# Altium PCB 海关全向控制器数传转接板V4.PcbDoc
Units mil, origin at the board's own origin, x right, y up, seen from the top; angles counter-clockwise.
Board outline 984.25 x 3346.46 mil, 2 copper layers (Top Layer, Bottom Layer), stack 65.792 mil thick; 35 components, 29 nets, 110 pads, 16 vias.
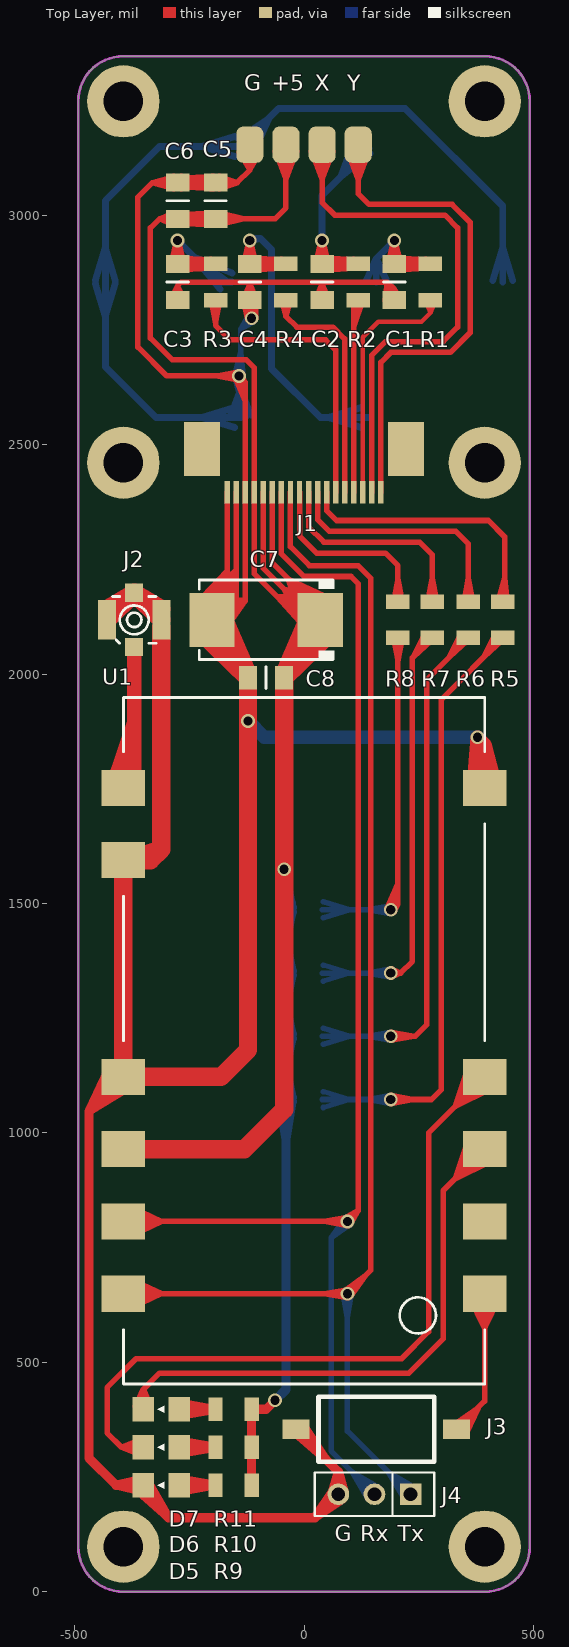
[diagram p0: Top Layer view]
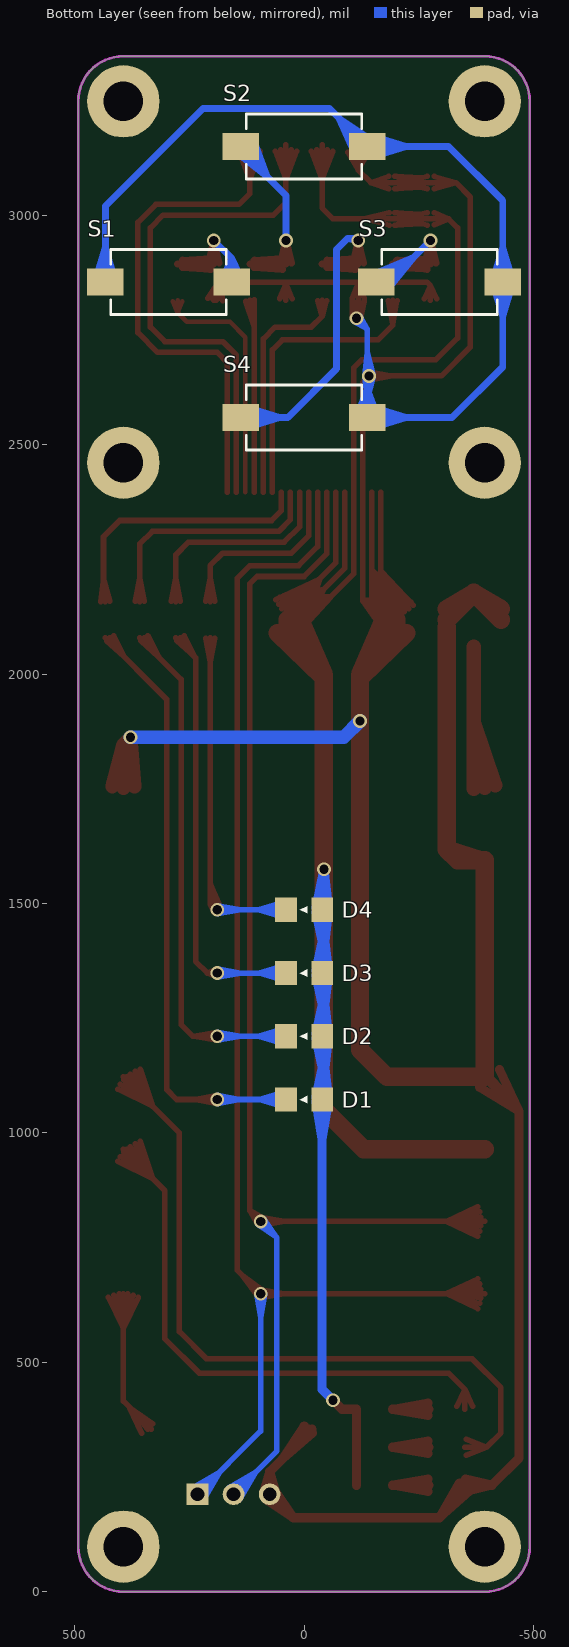
[diagram p1: Bottom Layer view, seen from below]
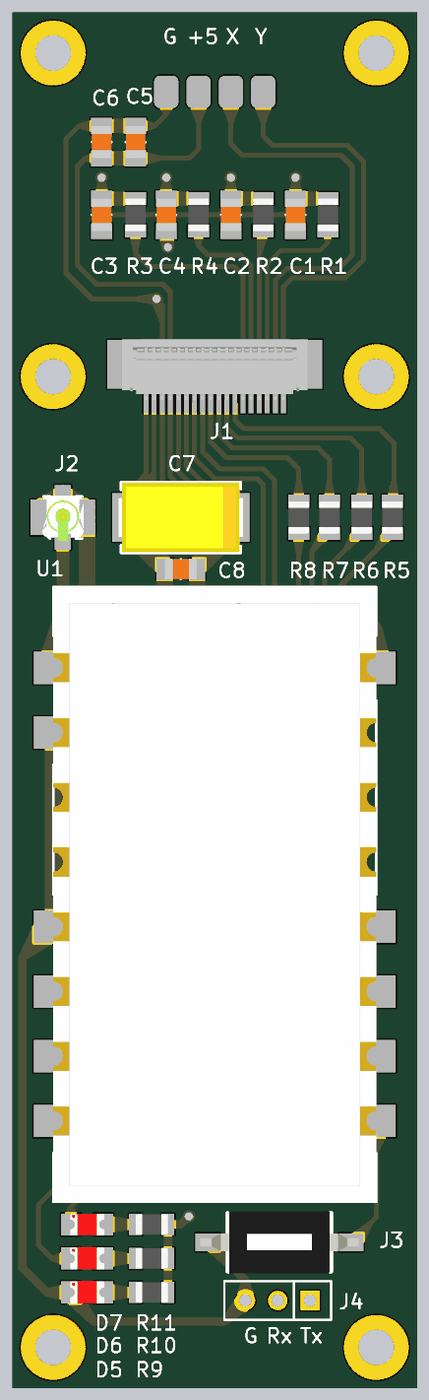
[diagram p2: 3D render of the assembled board from above, using the file's embedded part models]
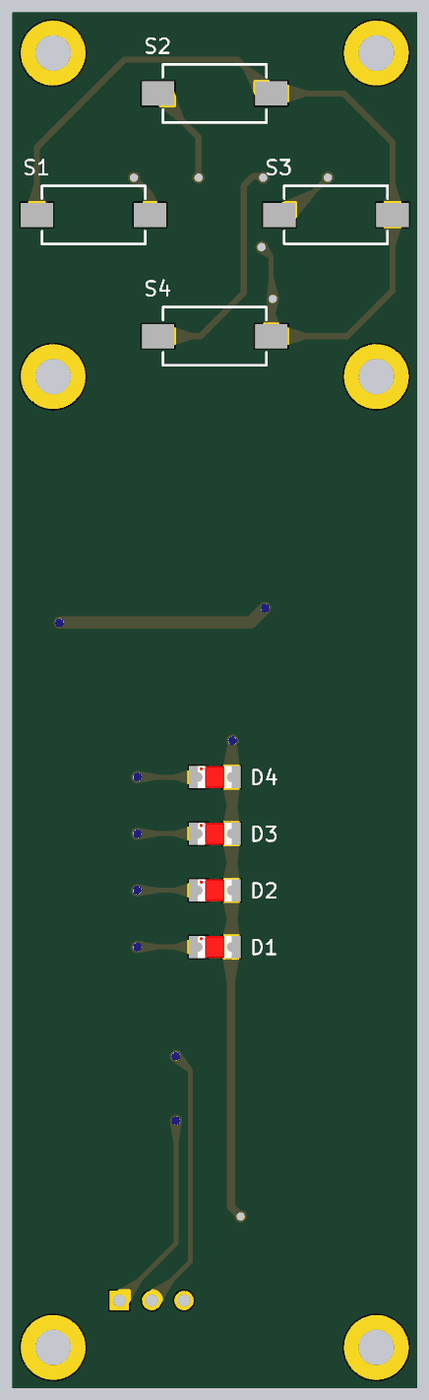
[diagram p3: 3D render of the assembled board from below, using the file's embedded part models]

## Layer stack, top to bottom
Top Solder: solder mask 0.4, Solder Resist, Dk 3.5
Top Layer: signal copper 1.4
Dielectric 1: dielectric 62.9921, FR-4, Dk 4.8
Bottom Layer: signal copper 1.4
Bottom Solder: solder mask 0.4, Solder Resist, Dk 3.5

## Board outline
-492.13,98.43 ccw(c-393.7,98.43) -393.7,0 393.7,0 ccw(c393.7,98.43) 492.13,98.43 492.13,3248.03 ccw(c393.7,3248.03) 393.7,3346.46 -393.7,3346.46 ccw(c-393.7,3248.03) -492.13,3248.03

## Design rules (kind name [scope] priority, off if disabled: settings)
Clearance [All] p1: gap=6
ComponentClearance [All] p1: gap=0 collisioncheckmode=3 verticalgap=0 showdistances=FALSE
Height [All] p1: minheight=0 maxheight=2000 prefheight=500
HoleSize [All] p1: absolutevalues=TRUE maxlimit=200 minlimit=1 maxpercent=80.000 minpercent=20.000
HoleToHoleClearance [All] p1: gap=6 allowstackedmicrovias=TRUE
MinimumSolderMaskSliver [All] p1: minsoldermaskwidth=0
PlaneConnect [All] p1: planeconnectstyle=Direct reliefexpansion=20 reliefentries=4 reliefconductorwidth=10 reliefairgap=10
PolygonConnect [All] p1: connectstyle=Direct reliefconductorwidth=10 reliefentries=4 polygonreliefangle="90 Angle" airgapwidth=10
RoutingVias [All] p1: holewidth=28 width=50 viastyle="Through Hole" minholewidth=8 minwidth=12 maxholewidth=200 maxwidth=300
SilkToSilkClearance [All] p1: silktosilkclearance=0
SilkToSolderMaskClearance [IsPad] p1: minsilkscreentomaskgap=0 clearancetoexposedcopper=TRUE
SolderMaskExpansion [All] p1: expansion=4
Width [All] p1: maxlimit=157.48 minlimit=10 preferedwidth=10
21 further rules are at their usual default settings.

## Components (designator, comment, footprint, x,y, rotation, side; value= is the part's Value field where it differs from the comment)
C1 "0.1uF" C0805 196.85,2854.33 r90 top
C2 "0.1uF" C0805 39.37,2854.33 r90 top
C3 "0.1uF" C0805 -275.59,2854.33 r90 top
C4 "0.1uF" C0805 -118.11,2854.33 r90 top
C5 "10uF" C0805 -192.91,3031.5 r270 top
C6 "0.1uF" C0805 -275.59,3031.5 r270 top
C7 "100uF/25V" C7343 -82.68,2118.11 r180 top
C8 "10uF" C0805 -82.68,1992.13 r0 top
D1 "LED" LED0805 0,1072.84 r0 bottom locked
D2 "LED" LED0805 0,1210.63 r0 bottom locked
D3 "LED" LED0805 0,1348.43 r0 bottom
D4 "LED" LED0805 0,1486.22 r0 bottom
D5 "LED" LED0805 -311.02,232.28 r180 top
D6 "LED" LED0805 -311.02,314.96 r180 top
D7 "LED" LED0805 -311.02,397.64 r180 top
J1 "Jack 1x18" 0.5S-6X-18PB 0,2443.41 r180 top
J2 "ANT-ipex" IPEX -370.08,2118.11 r0 top
J3 "Jack 1x2" A6S-1101-PH 157.48,354.33 r180 top
J4 "Jack 1x3" Jk1*3-2.0 153.54,212.6 r180 top
R1 "1K" R0805 275.59,2854.33 r90 top
R2 "1K" R0805 118.11,2854.33 r90 top
R3 "1K" R0805 -192.91,2854.33 r90 top
R4 "1K" R0805 -39.37,2854.33 r90 top
R5 "1K" R0805 433.07,2118.11 r90 top
R6 "1K" R0805 358.27,2118.11 r90 top
R7 "1K" R0805 279.53,2118.11 r90 top
R8 "1K" R0805 204.72,2118.11 r90 top
R9 "1K" R0805 -153.54,232.28 r0 top
R10 "1K" R0805 -153.54,314.96 r180 top
R11 "1K" R0805 -153.54,397.64 r180 top
S1 "SW-PB" SW3X6X5 295.28,2854.33 r0 bottom locked
S2 "SW-PB" SW3X6X5 0,3149.61 r180 bottom locked
S3 "SW-PB" SW3X6X5 -295.28,2854.33 r180 bottom locked
S4 "SW-PB" SW3X6X5 0,2559.06 r180 bottom locked
U1 "SV650" SV650 0,1200.79 r0 top locked

## Footprints (in the part's own frame and the unit in brackets; to place one, negate y for a bottom-side part, rotate by r counter-clockwise, add the part's x,y. Pads: shape width x height; smd on the part's side, far side on the other; paste and mask are expansions set on the pad)
0.5S-6X-18PB [mm]
  rect 0.3x1.25 smd: 1(-4.25,1.2) 2(-3.75,1.2) 3(-3.25,1.2) 4(-2.75,1.2) 5(-2.25,1.2) 6(-1.75,1.2) 7(-1.25,1.2) 8(-0.75,1.2) 9(-0.25,1.2) 10(0.25,1.2) 11(0.75,1.2) 12(1.25,1.2) 13(1.75,1.2) 14(2.25,1.2) 15(2.75,1.2) 16(3.25,1.2) 17(3.75,1.2) 18(4.25,1.2)
  rect 2x3 smd: ""(-5.65,-1.2) ""(5.65,-1.2)
  body extent -5.75,-2.75 5.75,1, height 1.27
A6S-1101-PH [mm] "1位表贴拨码开关2.54mm间距"
  rect 1.5x1.1 smd: 1(-4.45,0) 2(4.45,0)
  silkscreen extent -3.2,-1.8 3.2,1.8, body extent -4.9,-1.92 4.9,1.92, height 3.4
C0805 [mm]
  rect 1x1.3 smd: 1(-1,0) 2(1,0)
  silkscreen extent 0,-0.6 0,0.6, body extent -1,-0.63 1,0.63, height 0.8
C7343 [mm] "100uF/25V"
  rect 2.5x3 smd: 1(-3,0) 2(3,0)
  silkscreen extent -3.8,-2.2 3.7,2.2, body extent -3.87,-2.15 3.87,2.15, height 2.9
IPEX [mm]
  rect 1x1 smd: 1(0,-1.5) 2(0,1.5)
  rect 1x2.2 smd: 2(-1.5,0) 2(1.5,0)
  silkscreen extent -1.2,-1.3 1.2,1.3, body extent -1.45,-1.45 1.45,1.45, height 0.9
Jk1*3-2.0 [mm]
  rect 1.2x1.2 hole 0.762: 1(-2,0)
  round 1.2 hole 0.762: 2(0,0) 3(2,0)
  silkscreen extent -3.3,-1.2 3.3,1.2
LED0805 [mm]
  rect 1.2x1.35 smd: 1(-1,0) 2(1,0)
  silkscreen extent -0.18,-0.2 0.22,0.2, body extent -1.05,-0.67 1.05,0.68, height 0.8
R0805 [mm]
  rect 0.8x1.3 smd: 1(-1,0) 2(1,0)
  body extent -1,-0.63 1,0.63, height 0.47
SV650 [mm]
  rect 2.4x2 smd: 1(-10,14) 2(-10,10) 5(-10,-2) 6(-10,-6) 7(-10,-10) 8(-10,-14) 9(10,-14) 10(10,-10) 11(10,-6) 12(10,-2) 16(10,14)
  silkscreen extent -10,-19 10,19, body extent -10,-19 10,19, height 4
SW3X6X5 [mm] "2脚表贴轻触开关"
  rect 2x1.5 smd: 1(-3.5,0) 2(3.5,0)
  silkscreen extent -3.2,-1.8 3.2,1.8, body extent -4.03,-1.75 4.03,1.75, height 4.6

## Part data
C1 C2 C3 C4 C5 C6 C8: library part "Cap Semi"
C7: library part "Cap Poll"
J1 J3 J4: "插座"
R1 R2 R3 R4 R5 R6 R7 R8 R9 R10 R11: library part Res, "Resistor"
S1 S2 S3 S4: "Switch"

## Free pads (board coordinates)
  rrect50% 59.06x78.74 smd: 1(118.11,3153.54) 2(39.37,3153.54) 3(-39.37,3153.54) 4(-118.11,3153.54)
  round 157.48 hole 86.61: ""(-393.7,98.43) ""(-393.7,2460.63) ""(-393.7,3248.03) ""(393.7,98.43) ""(393.7,2460.63) ""(393.7,3248.03)

## Via types
v1: diameter 30, hole 20, Top Layer to Bottom Layer, tented both sides, 16 vias

## Nets (pads, with @x,y where several pads share a name; then routed paths per layer and width w, separated by ;. In a path a pad name is that pad's centre, name@x,y a point inside that pad or via, vN(x,y) a via of type N, cw(c..) or ccw(c..) an arc to the next point about the centre after c; other vN are vias at no path point)
+5V: C5.2 C6.2 C7.1 C8.2 D1.1 D2.1 D3.1 D4.1 J1.13 J1.14 J1.15 pad.3 R9.2 R10.1 R11.1 U1.6 | length 13307.5
  Top Layer w12: C6.2@-284.29,2978.73 -314.96,2992.13 ; C6.2@-284.29,3005.52 -314.96,2992.13 ; C6.2@-281.5,2992.13 -314.96,2992.13 ; C6.2@-269.69,2992.13 C5.2@-214,2992.13 ; C6.2@-268,2978.54 C5.2@-214,2992.13 ; C6.2@-268,3005.71 C5.2@-214,2992.13 ; C5.2@-202.88,2979.06 C6.2@-255.18,3002.48 ; C5.2@-202.88,3005.19 C6.2@-255.18,2981.77 ; C5.2@-197.97,2978.47 C6.2@-255.18,2981.77 ; C5.2@-197.97,3005.78 C6.2@-255.18,3002.48 ; C5.2@-187.01,2992.13 -131.32,2992.13 ; C5.2@-185.33,2978.54 -131.32,2992.13 ; C5.2@-185.33,3005.71 -131.32,2992.13 ; -108.27,2335.56 J1.15@-108.27,2377.46 ; J1.15@-108.27,2414.86 -108.27,2456.77 ; -88.58,2335.56 J1.14@-88.58,2377.46 ; J1.14 -88.58,2230.32 -3.94,2145.67 27.56,2145.67 -68.9,2242.13 J1.13 ; -68.9,2335.56 J1.13@-68.9,2377.46 ; pad.3@-62.52,3139.48 -39.37,3078.17 ; pad.3@-50.85,3142.69 -39.37,3078.17 ; pad.3@-39.37,3143.7 -39.37,3078.17 ; pad.3 -39.37,3015.75 -62.99,2992.13 C5.2 C6.2 -314.96,2992.13 ; pad.3@-27.89,3142.69 -39.37,3078.17 ; pad.3@-16.22,3139.48 -39.37,3078.17 ; C7.1@-2.19,2106.69 -34.41,2207.64 ; C7.1@2.93,2099.48 -43.26,2184.99 ; C7.1@9.19,2111.06 -34.41,2207.64 ; C7.1@10.29,2092.81 -58,2168.23 ; C7.1@13.29,2105.95 -43.26,2184.99 ; C7.1@18.83,2101.53 -58,2168.23 ; C7.1@19.9,2116.65 -34.41,2207.64 ; C7.1@22.68,2113.59 -43.26,2184.99 ; C7.1@26.19,2111.11 -58,2168.23 ; C7.1@29.85,2123.39 -34.41,2207.64 ; C7.1@30.99,2122.27 -43.26,2184.99 ; C7.1@32.34,2121.43 -58,2168.23 ; C7.1 -7.87,2118.11 -108.27,2218.5 J1.15 -108.27,2667.32 -125.98,2685.04 -287.4,2685.04 -334.65,2732.28 -334.65,2972.44 -314.96,2992.13 ; C7.1@38.05,2134.67 -58,2168.23 ; C7.1@39.45,2133.95 -43.26,2184.99 ; C7.1@40.69,2132.89 -34.41,2207.64 ; C7.1@41.34,2146.23 -58,2168.23 ; C7.1@43.25,2158.17 -58,2168.23 ; C7.1@43.72,2170.36 -58,2168.23 ; C7.1@45.12,2144.55 -43.26,2184.99 ; C7.1@48.67,2141.87 -34.41,2207.64 ; C7.1@49.46,2155.84 -43.26,2184.99 ; C7.1@52.38,2167.7 -43.26,2184.99 ; C7.1@55.62,2151.76 -34.41,2207.64 ; C7.1@61.44,2162.46 -34.41,2207.64 ; C6.2@-255.18,2981.77 C5.2@-198.82,2992.13 ; C6.2@-255.18,3002.48 C5.2@-198.82,2992.13 ; C6.2@-254.5,2992.13 -200.5,2978.54 C6.2@-254.5,2992.13 ; C6.2@-254.5,2992.13 -200.5,3005.71 C6.2@-254.5,2992.13 ; C6.2@-254.5,2992.13 C5.2@-198.82,2992.13 ; C6.2@-254.5,2992.13 C5.2@-198.82,2992.13 ; -58,2168.23 C7.1@35.43,2127.95 ; -43.26,2184.99 C7.1@35.43,2127.95 ; -34.41,2207.64 C7.1@35.43,2127.95
  Top Layer w20: v1(-62.99,417.32) -82.68,397.64 R11.1 ; R10.1 R9.2 -114.17,305.12 -114.17,242.13 R10.1 ; R10.1 R11.1 ; R10.1 -114.17,387.8 -114.17,324.8 R11.1
  Top Layer w40: U1.6 -129.92,964.57 -43.31,1051.18 v1(-43.31,1574.8) C8.2 ; U1.6@-385.83,964.57 -226.46,964.57 ; -43.31,1846.54 C8.2@-43.31,1986.22 ; C7.1 C7.1@35.43,2070.87 ; C8.2 C7.1@35.43,2070.87 ; C8.2 57.77,2089.45 C8.2@-43.31,1998.03 ; C8.2 9.68,2122.05 C8.2@-43.31,1998.03 ; C8.2 35.43,2108.27 C8.2@-43.31,1998.03 ; C8.2@-43.31,1998.03 C7.1@35.43,2070.87
  Bottom Layer w20: v1(-62.99,417.32) -39.37,440.94 D1.1 -43.31,1076.77 v1(-43.31,1574.8) ; D1.1@-52.98,1076.25 -43.31,1159.72 ; D2.1@-52.98,1207.21 -43.31,1123.87 ; D2.1@-52.98,1214.05 -43.31,1297.46 ; D3.1@-52.98,1345.01 -43.31,1261.61 ; D3.1@-52.98,1351.85 -43.31,1435.23 ; D4.1@-52.98,1482.8 -43.31,1399.39 ; D4.1@-52.98,1489.64 v1@-43.31,1572.94 ; D1.1@-52.95,1068.77 -39.37,986.26 ; D4.1@-51.76,1500.18 v1(-43.31,1574.8) ; D4.1@-39.87,1499.87 v1(-43.31,1574.8) ; D1.1@-39.37,1069.88 -39.37,986.26 ; D1.1@-39.37,1075.79 -43.31,1159.72 ; D2.1@-39.37,1207.68 -43.31,1123.87 ; D2.1@-39.37,1213.58 -43.31,1297.46 ; D3.1@-39.37,1345.47 -43.31,1261.61 ; D3.1@-39.37,1351.38 -43.31,1435.23 ; D4.1@-39.37,1483.27 -43.31,1399.39 ; D4.1@-39.37,1489.17 v1@-43.31,1572.94 ; D4.1@-28.01,1501.05 v1(-43.31,1574.8) ; D1.1@-25.86,1077.53 -43.31,1159.72 ; D2.1@-25.86,1205.94 -43.31,1123.87 ; D2.1@-25.86,1215.32 -43.31,1297.46 ; D3.1@-25.86,1343.73 -43.31,1261.61 ; D3.1@-25.86,1353.12 -43.31,1435.23 ; D4.1@-25.86,1481.53 -43.31,1399.39 ; D4.1@-25.86,1490.92 v1@-43.31,1572.94 ; D1.1@-25.79,1068.77 -39.37,986.26
GND: C1.1 C2.1 C3.1 C4.1 C5.1 C6.1 C7.2 C8.1 D5.2 J1.16 J1.17 J1.18 J2.2 J3.2 J4.3 pad.4 S1.2 S2.2 S3.2 S4.2 U1.2 U1.5 U1.16 | length 21714.9
  Top Layer w12: C3.1@-288.95,2817.94 -275.59,2846.46 ; C6.1@-283.4,3057.31 -330.71,3070.87 ; C6.1@-283.4,3084.42 -330.71,3070.87 ; C6.1@-281.5,3070.87 -330.71,3070.87 ; C3.1 -275.59,2846.46 ; C6.1@-269.69,3070.87 C5.1@-214,3070.87 ; C6.1@-268,3057.28 C5.1@-214,3070.87 ; C6.1@-268,3084.45 C5.1@-214,3070.87 ; C3.1@-262.23,2817.94 -275.59,2846.46 ; C7.2@-237.68,2150.45 -167.32,2224.31 ; C7.2@-234.15,2155.42 -147.64,2226.5 ; C7.2@-228.36,2142.58 -167.32,2224.31 ; C7.2@-225.93,2146.45 -147.64,2226.5 ; C7.2@-218.26,2135.94 -167.32,2224.31 ; C7.2@-216.85,2138.49 -147.64,2226.5 ; C7.2@-207.51,2130.56 -167.32,2224.31 ; C7.2@-207.3,2158.48 -127.95,2159.45 ; C7.2@-207.02,2131.58 -147.64,2226.5 ; C7.2@-206.49,2170.79 -127.95,2159.45 ; C7.2@-206.22,2146.38 -127.95,2159.45 ; C7.2@-203.35,2134.7 -127.95,2159.45 ; C5.1@-202.88,3057.8 C6.1@-255.18,3081.22 ; C5.1@-202.88,3083.93 C6.1@-255.18,3060.51 ; C7.2 -169.29,2118.11 -127.95,2159.45 ; C5.1@-197.97,3057.21 C6.1@-255.18,3060.51 ; C5.1@-197.97,3084.52 C6.1@-255.18,3081.22 ; C7.2@-197.63,2121.47 -127.95,2159.45 ; C7.2@-194.33,2124.74 -147.64,2226.5 ; C7.2@-193.89,2125.83 -167.32,2224.31 ; C7.2@-191.08,2111.37 -127.95,2159.45 ; C7.2@-188.98,2129.92 C7.2@-167.32,2151.57 ; C5.1@-187.01,3070.87 -145.67,3070.87 ; C5.1@-184.74,3057.37 -145.67,3070.87 ; C5.1@-184.74,3084.36 -145.67,3070.87 ; C7.2@-183.16,2120.32 -147.64,2226.5 ; C7.2@-183.01,2102.3 -127.95,2159.45 ; C7.2@-182.13,2123.39 -167.32,2224.31 ; C7.2@-173.48,2094.46 -127.95,2159.45 ; C7.2@-171.52,2117.11 -147.64,2226.5 ; C7.2@-170.08,2122.34 -167.32,2224.31 ; -167.32,2335.56 J1.18@-167.32,2377.46 ; J1.18 C7.2@-167.32,2151.57 ; C7.2@-159.51,2115.16 -147.64,2226.5 ; C7.2@-157.89,2122.74 -167.32,2224.31 ; v1@-150.27,2646.77 -127.95,2593.78 ; -147.64,2335.56 J1.17@-147.64,2377.46 ; J1.17 -147.64,2171.26 ; v1@-142.53,2640.64 -192.73,2649.61 ; v1@-142.53,2658.57 -192.73,2649.61 ; pad.4@-140.83,3137.59 -118.11,3098.43 ; v1@-132.85,2651.07 -127.95,2593.78 ; C4.1@-131.54,2817.6 -118.11,2850.39 ; pad.4@-129.54,3142.23 -118.11,3098.43 ; -127.95,2335.56 J1.16@-127.95,2377.46 ; J1.16@-127.95,2414.86 -127.95,2456.77 ; v1@-123.17,2775.72 C4.1 ; v1@-122.69,2772.67 C4.1@-131.54,2812.32 ; v1@-122.56,2778.86 C4.1@-104.68,2812.32 ; pad.4@-118.11,3143.7 -118.11,3098.43 ; pad.4 -118.11,3098.43 ; pad.4@-106.68,3142.23 -118.11,3098.43 ; v1@-106.51,2780.31 C4.1@-131.54,2812.32 ; v1@-105.38,2777.5 C4.1 ; v1@-105.25,2774.39 C4.1@-104.68,2812.32 ; C4.1@-104.68,2817.6 -118.11,2850.39 ; pad.4@-95.39,3137.59 -118.11,3098.43 ; C2.1@25.94,2817.6 39.37,2850.39 ; C2.1 39.37,2850.39 ; C2.1@52.8,2817.6 39.37,2850.39 ; C1.1@177.3,2813.93 181.1,2854.33 ; C1.1@190.94,2814.96 181.1,2854.33 ; C1.1@203.47,2820.47 181.1,2854.33 ; -330.71,3070.87 C6.1 C5.1 -145.67,3070.87 ; -330.71,3070.87 -362.2,3039.37 -362.2,2712.6 -299.21,2649.61 v1(-141.73,2649.61) ; -275.59,2846.46 -267.72,2854.33 181.1,2854.33 ; C6.1@-255.18,3060.51 C5.1@-198.82,3070.87 ; C6.1@-255.18,3081.22 C5.1@-198.82,3070.87 ; C6.1@-254.5,3070.87 -200.5,3057.28 C6.1@-254.5,3070.87 ; C6.1@-254.5,3070.87 -200.5,3084.45 C6.1@-254.5,3070.87 ; C6.1@-254.5,3070.87 C5.1@-198.82,3070.87 ; C6.1@-254.5,3070.87 C5.1@-198.82,3070.87 ; C7.2@-200.79,2127.95 -167.32,2224.31 ; C7.2@-200.79,2127.95 -147.64,2171.26 ; C7.2@-200.79,2127.95 -127.95,2159.45 ; C7.2@-200.79,2127.95 -147.64,2226.5 ; C7.2@-200.79,2127.95 -147.64,2171.26 ; -192.73,2649.61 v1(-141.73,2649.61) ; C7.2@-167.32,2151.57 -147.64,2171.26 ; -147.64,2171.26 -216.14,2168.35 -147.64,2171.26 ; -147.64,2171.26 -164.32,2104.76 -147.64,2171.26 ; -147.64,2171.26 -214.48,2156 -147.64,2171.26 ; -147.64,2171.26 -176.08,2108.88 -147.64,2171.26 ; -147.64,2171.26 -210.72,2144.4 -147.64,2171.26 ; -147.64,2171.26 -186.68,2114.91 -147.64,2171.26 ; -147.64,2171.26 -205.04,2133.78 -147.64,2171.26 ; -147.64,2171.26 -195.94,2122.61 -147.64,2171.26 ; -145.67,3070.87 -118.11,3098.43 ; v1(-141.73,2649.61) -127.95,2635.83 J1.16 -127.95,2159.45 ; v1(-141.73,2649.61) -127.95,2593.78 ; C4.1@-131.54,2812.32 v1@-118.11,2779.53 ; C4.1@-131.54,2812.32 v1(-114.17,2775.59) ; v1@-118.11,2779.53 C4.1 ; v1@-118.11,2779.53 v1(-114.17,2775.59) ; v1@-118.11,2779.53 C4.1@-104.68,2812.32 ; C4.1 -118.11,2850.39 ; C4.1 v1(-114.17,2775.59) ; v1(-114.17,2775.59) C4.1@-104.68,2812.32 ; 181.1,2854.33 196.85,2838.58 ; 196.85,2838.58 C1.1 196.85,2838.58 ; 196.85,2838.58 183.75,2818.93 196.85,2838.58 ; 196.85,2838.58 209.95,2818.93 196.85,2838.58
  Top Layer w20: U1.5@-426.09,1138.22 -468.5,1047.24 ; U1.5@-401.57,1122.05 -468.5,1047.24 ; U1.5 -468.5,1047.24 ; U1.5@-382.79,1099.47 -468.5,1047.24 ; D5.2@-360.27,219.95 -295.28,161.42 ; D5.2@-351.96,218.75 -409.45,232.28 ; D5.2@-351.96,245.81 -409.45,232.28 ; D5.2@-350.39,229.33 -295.28,161.42 ; D5.2@-339.18,237.07 -295.28,161.42 ; J3.2@-18.06,346.07 46.36,290.25 ; J3.2 74.8,261.81 ; J3.2@-9.84,354.33 46.36,290.25 ; J3.2@-0.58,361.4 46.36,290.25 ; J4.3@61.31,214.48 74.8,261.81 ; J4.3@64.31,221.28 23.62,161.42 ; J4.3@83.49,202.1 23.62,161.42 ; J4.3@88.29,214.48 74.8,261.81 ; -468.5,1047.24 -468.5,291.34 -409.45,232.28 ; -409.45,232.28 D5.2 -350.39,216.54 -295.28,161.42 ; -295.28,161.42 23.62,161.42 ; 23.62,161.42 J4.3 74.8,261.81
  Top Layer w30: U1.16@416.2,1761.42 v1(377.95,1862.2) ; U1.16@417.87,1755.11 393.7,1846.46 ; v1(377.95,1862.2) 393.7,1846.46 ; v1(377.95,1862.2) 393.7,1846.46 ; v1(377.95,1862.2) U1.16 393.7,1846.46 ; v1(377.95,1862.2) 393.7,1846.46 ; v1(377.95,1862.2) 369.53,1755.11 393.7,1846.46 ; v1(377.95,1862.2) 393.7,1846.46
  Top Layer w40: J2.2@-429.13,2118.11 J2.2@-370.08,2177.17 ; J2.2@-429.13,2141.73 J2.2@-370.08,2177.17 ; U1.5@-385.83,1122.05 -226.46,1122.05 ; -311.02,1954.8 J2.2@-311.02,2094.49 ; J2.2@-311.02,2102.36 -311.02,1618.11 ; J2.2@-311.02,2118.11 J2.2@-370.08,2177.17 ; J2.2@-311.02,2141.73 J2.2@-370.08,2177.17 ; C7.2 C7.2@-200.79,2070.87 ; -122.05,1762.64 v1(-122.05,1897.64) ; U1.2@-385.83,1594.49 -334.65,1594.49 ; U1.2@-385.83,1594.49 -311.02,1618.11 ; U1.2@-385.83,1594.49 -334.65,1594.49 ; -334.65,1594.49 -311.02,1618.11 ; -334.65,1594.49 U1.2 U1.5 -181.1,1122.05 -122.05,1181.1 v1(-122.05,1897.64) ; C7.2@-200.79,2070.87 C8.1 ; C7.2@-200.79,2070.87 C8.1@-122.05,1998.03 ; v1(-122.05,1897.64) C8.1 ; v1(-122.05,1897.64) -122.05,1986.22 v1(-122.05,1897.64) ; v1(-122.05,1897.64) C8.1 ; C8.1 -175.03,2122.05 C8.1@-122.05,1998.03 ; C8.1 -223.13,2089.45 C8.1@-122.05,1998.03 ; C8.1 -200.79,2108.27 C8.1@-122.05,1998.03
  Bottom Layer w12: S4.2@-160.94,2563.28 -137.8,2624.58 ; v1@-150.61,2648.14 -137.8,2598.25 ; v1@-150.61,2651.08 -137.8,2700.98 ; S4.2@-149.28,2560.07 -137.8,2624.58 ; v1@-132.73,2649.51 -137.8,2598.25 ; v1@-132.73,2649.7 -137.8,2700.98 ; S4.2@-126.31,2560.07 -137.8,2624.58 ; v1@-121.34,2781.04 -137.8,2751.97 ; S4.2@-114.65,2563.28 -137.8,2624.58 ; v1(-114.17,2775.59) -137.8,2751.97 ; v1@-108.72,2768.43 -137.8,2751.97 ; -137.8,2598.25 v1(-141.73,2649.61) -137.8,2700.98 ; -137.8,2624.58 S4.2 -137.8,2751.97
  Bottom Layer w15: S3.2@-454.86,2851.08 -433.07,2779.8 S3.2@-411.29,2851.08 ; S3.2@-454.86,2857.59 -433.07,2928.86 S3.2@-411.29,2857.59 ; S4.2@-150.89,2537.27 -222.17,2559.06 ; S4.2@-150.89,2580.84 -222.17,2559.06 ; S2.2@-150.89,3127.82 -222.17,3149.61 ; S2.2@-150.89,3171.39 -222.17,3149.61 ; S4.2@-147.64,2559.06 -222.17,2559.06 ; S2.2@-147.64,3149.61 -222.17,3149.61 ; S2.2@-142.71,3165.96 -76.45,3210.95 ; S4.2 -322.83,2559.06 -433.07,2669.29 S3.2 -433.07,3031.5 -314.96,3149.61 S2.2 -55.12,3232.28 220.47,3232.28 433.07,3019.68 S1.2 ; S2.2@-127.95,3149.61 -76.45,3210.95 ; S2.2@-109.3,3137.9 -76.45,3210.95 ; S1.2@411.29,2857.59 433.07,2928.86 S1.2@454.86,2857.59
  Bottom Layer w30: v1(-122.05,1897.64) -86.61,1862.2 v1(377.95,1862.2)
KEY1: J1.3 R1.1 | length 626.3
  Top Layer w10: J1.3 127.95,2734.25 161.42,2767.72 255.91,2767.72 275.59,2787.4 ; J1.3@127.95,2414.86 127.95,2450.77 ; R1.1@265.05,2812.87 275.59,2787.4 ; R1.1 275.59,2787.4 ; R1.1@286.13,2812.87 275.59,2787.4
KEY2: J1.4 R2.1 | length 638.3
  Top Layer w12: J1.4 108.27,2805.12 R2.1 108.27,2757.96 ; J1.4@108.27,2414.86 108.27,2456.77 ; R2.1@108.4,2815.81 108.27,2757.96 ; R2.1@127.54,2812.5 108.27,2757.96
KEY3: J1.6 R3.1 | length 794.9
  Top Layer w12: R3.1@-202.62,2814.04 -192.91,2763.21 R3.1@-183.21,2814.04 ; R3.1 -192.91,2759.84 -161.42,2728.35 47.24,2728.35 68.9,2706.69 J1.6 ; J1.6@68.9,2414.86 68.9,2456.77
KEY4: J1.5 R4.1 | length 630.7
  Top Layer w12: R4.1@-49.03,2813.62 -39.37,2779.53 ; R4.1 -39.37,2779.53 ; R4.1@-29.71,2813.62 -39.37,2779.53 ; J1.5 88.58,2730.32 62.99,2755.91 -15.75,2755.91 -39.37,2779.53 ; J1.5@88.58,2414.86 88.58,2456.77
NetC1_2: C1.2 R1.2 S1.1 | length 1538.1
  Top Layer w15: C1.2@202.34,2881.52 R1.2@265.19,2885.47 ; C1.2@202.34,2905.88 R1.2@265.19,2901.93 ; C1.2@205.51,2881.83 R1.2@265.19,2901.93 ; C1.2@205.51,2905.57 R1.2@265.19,2885.47 ; R1.2 C1.2 ; C1.2 v1(196.85,2944.88) ; C1.2 v1(196.85,2944.88) ; v1(196.85,2944.88) 184.75,2895.15 v1(196.85,2944.88) ; v1(196.85,2944.88) 208.95,2895.15 v1(196.85,2944.88) ; C1.2@202.76,2893.7 R1.2@267.44,2893.7 ; C1.2@202.76,2893.7 R1.2@265.19,2885.47 ; C1.2@202.76,2893.7 R1.2@265.19,2901.93 ; C1.2@202.76,2893.7 R1.2@265.75,2893.7 ; C1.2@205,2893.7 R1.2@265.19,2885.47 ; C1.2@205,2893.7 R1.2@265.19,2901.93 ; C1.2@205,2893.7 R1.2@265.75,2893.7 ; R1.2@265.75,2893.7 203.93,2905.83 R1.2@267.44,2893.7 ; R1.2@265.75,2893.7 203.93,2881.57 R1.2@267.44,2893.7
  Bottom Layer w15: S1.1@135.97,2859.07 157.48,2905.51 ; S1.1 157.48,2905.51 ; S1.1@178.99,2859.07 157.48,2905.51 ; v1(196.85,2944.88) 157.48,2905.51
NetC2_2: C2.2 R2.2 S2.1 | length 1793.7
  Top Layer w15: C2.2@45.28,2893.7 R2.2@109.96,2893.7 ; C2.2@46.42,2881.57 R2.2@109.96,2893.7 ; C2.2@46.42,2905.83 R2.2@109.96,2893.7 ; R2.2@106.14,2885.73 C2.2@48.11,2905.51 ; R2.2@106.14,2901.67 C2.2@48.11,2881.89 ; R2.2@109.31,2885.52 C2.2@48.11,2881.89 ; R2.2@109.31,2901.88 C2.2@48.11,2905.51 ; R2.2 C2.2 ; C2.2 v1(39.37,2944.88) ; C2.2 v1(39.37,2944.88) ; v1(39.37,2944.88) 27.27,2895.15 v1(39.37,2944.88) ; v1(39.37,2944.88) 51.47,2895.15 v1(39.37,2944.88) ; C2.2@47.52,2893.7 107.71,2885.47 C2.2@47.52,2893.7 ; C2.2@47.52,2893.7 107.71,2901.93 C2.2@47.52,2893.7 ; C2.2@47.52,2893.7 R2.2@108.27,2893.7 ; C2.2@47.52,2893.7 R2.2@108.27,2893.7 ; C2.2@48.11,2881.89 R2.2@108.27,2893.7 ; C2.2@48.11,2905.51 R2.2@108.27,2893.7
  Bottom Layer w15: v1(39.37,2944.88) 39.37,3043.31 S2.1@141.73,3145.67 ; S2.1@108.5,3159.94 81.34,3085.27 ; S2.1@127.95,3149.61 81.34,3085.27 ; S2.1@143.83,3134.34 81.34,3085.27
NetC3_2: C3.2 R3.2 S3.1 | length 1588
  Top Layer w15: C3.2@-287.69,2895.15 v1(-275.59,2944.88) ; C3.2@-269.69,2893.7 R3.2@-205,2893.7 ; C3.2@-268.54,2881.57 R3.2@-205,2893.7 ; C3.2@-268.54,2905.83 R3.2@-205,2893.7 ; C3.2@-263.49,2895.15 v1(-275.59,2944.88) ; R3.2@-204.79,2885.71 C3.2@-263.07,2904.79 ; R3.2@-204.79,2901.7 C3.2@-263.07,2882.62 ; R3.2@-201.81,2885.51 C3.2@-263.07,2882.62 ; R3.2@-201.81,2901.9 C3.2@-263.07,2904.79 ; R3.2 C3.2 v1(-275.59,2944.88) ; C3.2@-263.5,2893.7 -203.32,2885.47 C3.2@-263.5,2893.7 ; C3.2@-263.5,2893.7 -203.32,2901.93 C3.2@-263.5,2893.7 ; C3.2@-263.5,2893.7 R3.2@-202.76,2893.7 ; C3.2@-263.5,2893.7 R3.2@-202.76,2893.7 ; C3.2@-263.07,2882.62 R3.2@-202.76,2893.7 ; C3.2@-263.07,2904.79 R3.2@-202.76,2893.7
  Bottom Layer w15: v1(-275.59,2944.88) -185.04,2854.33 S3.1 ; S3.1@-182.63,2838.49 -239.13,2908.42 ; S3.1@-167.32,2854.33 -239.13,2908.42 ; S3.1@-156.33,2873.42 -239.13,2908.42
NetC4_2: C4.2 R4.2 S4.1 | length 2151.6
  Top Layer w15: C4.2@-112.62,2881.52 R4.2@-49.77,2885.47 ; C4.2@-112.62,2905.88 R4.2@-49.77,2901.93 ; C4.2@-111.06,2881.57 R4.2@-47.52,2893.7 ; C4.2@-111.06,2905.83 R4.2@-47.52,2893.7 ; C4.2@-111.03,2881.57 R4.2@-49.21,2893.7 ; C4.2@-111.03,2905.83 R4.2@-49.21,2893.7 ; C4.2@-109.45,2881.83 R4.2@-49.77,2901.93 ; C4.2@-109.45,2905.57 R4.2@-49.77,2885.47 ; R4.2 C4.2 ; C4.2 v1(-118.11,2944.88) ; C4.2 v1(-118.11,2944.88) ; v1(-118.11,2944.88) -130.21,2895.15 v1(-118.11,2944.88) ; v1(-118.11,2944.88) -106.01,2895.15 v1(-118.11,2944.88) ; C4.2@-112.2,2893.7 R4.2@-47.52,2893.7 ; C4.2@-112.2,2893.7 R4.2@-49.77,2885.47 ; C4.2@-112.2,2893.7 R4.2@-49.77,2901.93 ; C4.2@-112.2,2893.7 R4.2@-49.21,2893.7 ; C4.2@-109.96,2893.7 R4.2@-49.77,2885.47 ; C4.2@-109.96,2893.7 R4.2@-49.77,2901.93 ; C4.2@-109.96,2893.7 R4.2@-49.21,2893.7
  Bottom Layer w15: S4.1@124.7,2537.27 53.43,2559.06 ; S4.1@124.7,2580.84 53.43,2559.06 ; S4.1@127.95,2559.06 53.43,2559.06 ; S4.1@141.73,2559.06 35.43,2559.06 -70.87,2665.35 -70.87,2925.2 -94.49,2948.82 ; -94.49,2948.82 -114.17,2948.82 v1(-118.11,2944.88) -94.49,2948.82
NetD1_2: D1.2 R5.1 | length 1787.1
  Top Layer w12: v1(188.98,1072.84) 277.56,1072.84 299.21,1094.49 299.21,1944.88 R5.1 ; v1@189.77,1063.87 239.98,1072.84 v1@189.77,1081.8 ; R5.1@414.95,2083.89 391.87,2037.54 ; R5.1@423.23,2078.74 391.87,2037.54 ; R5.1@430.39,2072.13 391.87,2037.54
  Bottom Layer w12: D1.2 v1(188.98,1072.84) ; D1.2@41.97,1055.41 98.99,1072.84 D1.2@41.97,1090.26 ; v1@188.18,1063.87 137.98,1072.84 v1@188.18,1081.8
NetD2_2: D2.2 R6.1 | length 1648.6
  Top Layer w12: v1(188.98,1210.63) 242.13,1210.63 267.72,1236.22 267.72,1988.19 R6.1 ; v1@189.77,1201.67 239.98,1210.63 v1@189.77,1219.6 ; R6.1@340.15,2083.89 317.06,2037.54 ; R6.1@348.43,2078.74 317.06,2037.54 ; R6.1@355.59,2072.13 317.06,2037.54
  Bottom Layer w12: D2.2 v1(188.98,1210.63) 137.98,1210.63 ; D2.2@41.97,1193.2 98.99,1210.63 D2.2@41.97,1228.06 ; v1@188.18,1201.67 137.98,1210.63 ; v1@188.18,1219.6 137.98,1210.63
NetD3_2: D3.2 R7.1 | length 1401
  Top Layer w12: v1(188.98,1348.43) 210.63,1348.43 ; v1@190.85,1339.62 210.63,1348.43 ; v1@190.85,1357.23 210.63,1348.43 ; R7.1@261.41,2083.89 238.32,2037.54 ; R7.1@269.69,2078.74 238.32,2037.54 ; R7.1@276.85,2072.13 238.32,2037.54 ; R7.1 236.22,2035.43 236.22,1374.02 210.63,1348.43
  Bottom Layer w12: D3.2 v1(188.98,1348.43) 137.98,1348.43 ; D3.2@41.97,1331 98.99,1348.43 D3.2@41.97,1365.85 ; v1@188.18,1339.46 137.98,1348.43 ; v1@188.18,1357.39 137.98,1348.43
NetD4_2: D4.2 R8.1 | length 1430.6
  Top Layer w12: v1@180.5,1489.25 204.72,1543.68 ; v1@188.98,1484.25 204.72,1500 ; R8.1@195.02,2077.82 204.72,2026.99 R8.1@214.43,2077.82 ; v1@197.81,1484.51 204.72,1543.68 ; R8.1 204.72,1500 ; v1(188.98,1486.22) 204.72,1500 ; v1(188.98,1486.22) 204.72,1543.68 ; v1(188.98,1486.22) 204.72,1500 ; 204.72,1500 184.65,1494.11 204.72,1500 ; 204.72,1500 196.22,1480.88 204.72,1500
  Bottom Layer w12: D4.2 v1(188.98,1486.22) 137.98,1486.22 ; D4.2@41.97,1468.79 98.99,1486.22 D4.2@41.97,1503.65 ; v1@188.18,1477.26 137.98,1486.22 ; v1@188.18,1495.19 137.98,1486.22
NetD5_1: D5.1 R9.1 | length 236.2
  Top Layer w20: D5.1 R9.1 ; D5.1@-270.48,218.71 R9.1 ; D5.1@-270.48,245.85 R9.1
NetD6_1: D6.1 R10.2 | length 236.2
  Top Layer w20: D6.1 R10.2 ; D6.1@-270.48,301.39 R10.2 ; D6.1@-270.48,328.53 R10.2
NetD6_2: D6.2 U1.12 | length 2245.7
  Top Layer w12: D6.2@-353.68,297.65 -397.64,314.96 ; D6.2@-353.68,332.27 -397.64,314.96 ; D6.2 -397.64,314.96 ; U1.12@356.97,1138.81 328.87,1057.22 ; U1.12@368.15,1134.05 328.87,1057.22 ; U1.12@378.46,1127.84 328.87,1057.22 ; U1.12@385.83,1122.05 328.87,1057.22 ; U1.12@392.52,1115.49 328.87,1057.22 ; U1.12 271.65,1000 271.65,566.93 212.6,507.87 -366.14,507.87 -429.13,444.88 -429.13,346.46 -397.64,314.96 ; U1.12@400.01,1106.06 328.87,1057.22 ; U1.12@406.16,1095.59 328.87,1057.22
NetD7_1: D7.1 R11.2 | length 236.2
  Top Layer w20: D7.1 R11.2 ; D7.1@-270.48,384.07 R11.2 ; D7.1@-270.48,411.21 R11.2
NetD7_2: D7.2 U1.11 | length 1918.5
  Top Layer w12: D7.2@-367.59,404.44 -350.39,440.94 ; D7.2 -350.39,440.94 ; D7.2@-350.39,400.59 -350.39,440.94 ; D7.2@-333.2,404.44 -350.39,440.94 ; U1.11@356.97,981.33 328.87,899.74 ; U1.11@368.15,976.57 328.87,899.74 ; U1.11@378.46,970.36 328.87,899.74 ; U1.11@385.83,964.57 328.87,899.74 ; U1.11@392.52,958.01 328.87,899.74 ; U1.11 303.15,874.02 303.15,551.18 228.35,476.38 -314.96,476.38 -350.39,440.94 ; U1.11@400.01,948.58 328.87,899.74 ; U1.11@406.16,938.11 328.87,899.74
NetJ2_1: J2.1 U1.1 | length 754.7
  Top Layer w31.5: U1.1@-416.63,1757.67 -370.08,1896 ; U1.1@-370.16,1750.04 -370.08,1896 ; J2.1 -370.08,1775.59 U1.1 -370.08,1896
NetJ3_1: J3.1 U1.9 | length 956.7
  Top Layer w12: J3.1@329.9,365.8 379.79,401.44 ; J3.1 393.7,415.35 U1.9 ; J3.1@340.55,354.33 379.79,401.44 ; J3.1@353.76,345.93 379.79,401.44 ; U1.9@361.16,642.22 393.7,574.24 ; U1.9@372.55,646.58 393.7,574.24 ; U1.9@384.35,649.02 393.7,574.24 ; U1.9@403.05,649.02 393.7,574.24 ; U1.9@414.86,646.58 393.7,574.24 ; U1.9@426.24,642.22 393.7,574.24
POWLED1: J1.7 R5.2 | length 773
  Top Layer w12: J1.7@49.21,2377.46 49.21,2356.3 ; J1.7 49.21,2356.3 ; R5.2@423.46,2159.11 437.01,2209.74 ; R5.2@442.82,2157.66 437.01,2209.74 ; 49.21,2356.3 70.87,2334.65 401.57,2334.65 437.01,2299.21 437.01,2161.42 R5.2 437.01,2209.74
POWLED2: J1.8 R6.2 | length 732.4
  Top Layer w12: J1.8@29.53,2377.46 29.53,2336.61 ; J1.8 29.53,2336.61 ; R6.2@348.56,2158.4 358.27,2209.23 ; R6.2@367.97,2158.4 358.27,2209.23 ; 29.53,2336.61 55.12,2311.02 330.71,2311.02 358.27,2283.46 R6.2 358.27,2209.23
POWLED3: J1.9 R7.2 | length 618
  Top Layer w12: 9.84,2335.56 J1.9@9.84,2377.46 ; J1.9 9.84,2320.87 43.31,2287.4 251.97,2287.4 279.53,2259.84 R7.2 ; R7.2@269.82,2158.4 279.53,2209.23 R7.2@289.23,2158.4
POWLED4: J1.10 R8.2 | length 560.6
  Top Layer w12: -9.84,2335.56 J1.10@-9.84,2377.46 ; J1.10 -9.84,2301.18 27.56,2263.78 177.17,2263.78 204.72,2236.22 R8.2 ; R8.2@195.02,2158.4 204.72,2209.23 R8.2@214.43,2158.4
ROCKER2_X: J1.2 pad.2 | length 1541.2
  Top Layer w12: pad.2@16.22,3139.48 39.37,3078.17 ; pad.2@27.89,3142.69 39.37,3078.17 ; pad.2@39.37,3143.7 39.37,3078.17 ; pad.2 39.37,3027.56 66.93,3000 307.09,3000 334.65,2972.44 334.65,2755.91 303.15,2724.41 177.17,2724.41 147.64,2694.88 J1.2 ; pad.2@50.85,3142.69 39.37,3078.17 ; pad.2@62.52,3139.48 39.37,3078.17 ; J1.2@147.64,2414.86 147.64,2456.77
ROCKER2_Y: J1.1 pad.1 | length 1490.9
  Top Layer w12: pad.1@94.96,3139.48 118.11,3078.17 ; pad.1@106.63,3142.69 118.11,3078.17 ; pad.1@118.11,3143.7 118.11,3078.17 ; pad.1 118.11,3047.24 141.73,3023.62 322.83,3023.62 362.2,2984.25 362.2,2744.09 318.9,2700.79 188.98,2700.79 167.32,2679.13 J1.1 ; pad.1@129.59,3142.69 118.11,3078.17 ; pad.1@141.26,3139.48 118.11,3078.17 ; J1.1@167.32,2414.86 167.32,2456.77
RX: J1.12 J4.2 U1.7 | length 3911.4
  Top Layer w12: U1.7 v1(94.49,807.09) 118.11,830.71 ; U1.7@-385.83,807.09 -310.46,807.09 ; U1.7@-385.24,797.73 -310.46,807.09 ; U1.7@-385.24,816.44 -310.46,807.09 ; U1.7@-382.8,785.93 -310.46,807.09 ; U1.7@-382.8,828.24 -310.46,807.09 ; U1.7@-378.44,774.54 -310.46,807.09 ; U1.7@-378.44,839.63 -310.46,807.09 ; -49.21,2335.56 J1.12@-49.21,2377.46 ; J1.12 -49.21,2261.81 0,2212.6 102.36,2212.6 118.11,2196.85 118.11,830.71 ; v1@89.04,814.25 118.11,830.71 ; v1@93.69,798.12 43.49,807.09 v1@93.69,816.05 ; v1@101.65,801.64 118.11,830.71
  Bottom Layer w12: v1@87.58,812.85 59.06,771.65 ; v1(94.49,807.09) 59.06,771.65 ; v1@100.25,800.18 59.06,771.65 ; J4.2@139.6,201.82 104.47,261.68 ; J4.2@164.32,226.54 104.47,261.68 ; 59.06,771.65 59.06,307.09 J4.2 104.47,261.68
TX: J1.11 J4.1 U1.8 | length 3981
  Top Layer w12: U1.8 v1(94.49,649.61) 145.67,700.79 145.67,2208.66 118.11,2236.22 11.81,2236.22 -29.53,2277.56 J1.11 ; U1.8@-385.83,649.61 -310.46,649.61 ; U1.8@-385.24,640.25 -310.46,649.61 ; U1.8@-385.24,658.96 -310.46,649.61 ; U1.8@-382.8,628.45 -310.46,649.61 ; U1.8@-382.8,670.76 -310.46,649.61 ; U1.8@-378.44,617.06 -310.46,649.61 ; U1.8@-378.44,682.15 -310.46,649.61 ; -29.53,2335.56 J1.11@-29.53,2377.46 ; v1@88.64,656.45 134.94,690.06 v1@101.33,643.76 ; v1@93.69,640.64 43.49,649.61 v1@93.69,658.57
  Bottom Layer w12: v1@85.52,648.81 94.49,598.61 v1@103.45,648.81 ; v1(94.49,649.61) 94.49,350.39 J4.1 183.21,261.68 ; J4.1@218.34,201.82 183.21,261.68 ; J4.1@243.06,226.54 183.21,261.68
pads on no net: J1. U1.10

## Keep-outs
Keep-Out Layer:
  the board outline again, w6

## Silkscreen, mask and mechanical layers (free items; w line width, h text height)
Top Overlay:
  text "G" at -129.92,3271.65 h35
  text "+5" at -70.87,3271.65 h35
  text "X" at 23.62,3271.65 h35
  text "Y" at 94.49,3271.65 h35
  text "G" at 66.93,110.24 h35
  text "Rx" at 122.05,110.24 h35
  text "Tx" at 204.72,110.24 h35